# Altium PCB PCB1.PcbDoc
Units mil, origin at the board's own origin, x right, y up, seen from the top; angles counter-clockwise.
Board outline 6000 x 4000 mil, 2 copper layers (Top Layer, Bottom Layer); 41 components, 20 nets, 120 pads, 34 vias.
Unrouted connection lines stored in the file: 44.
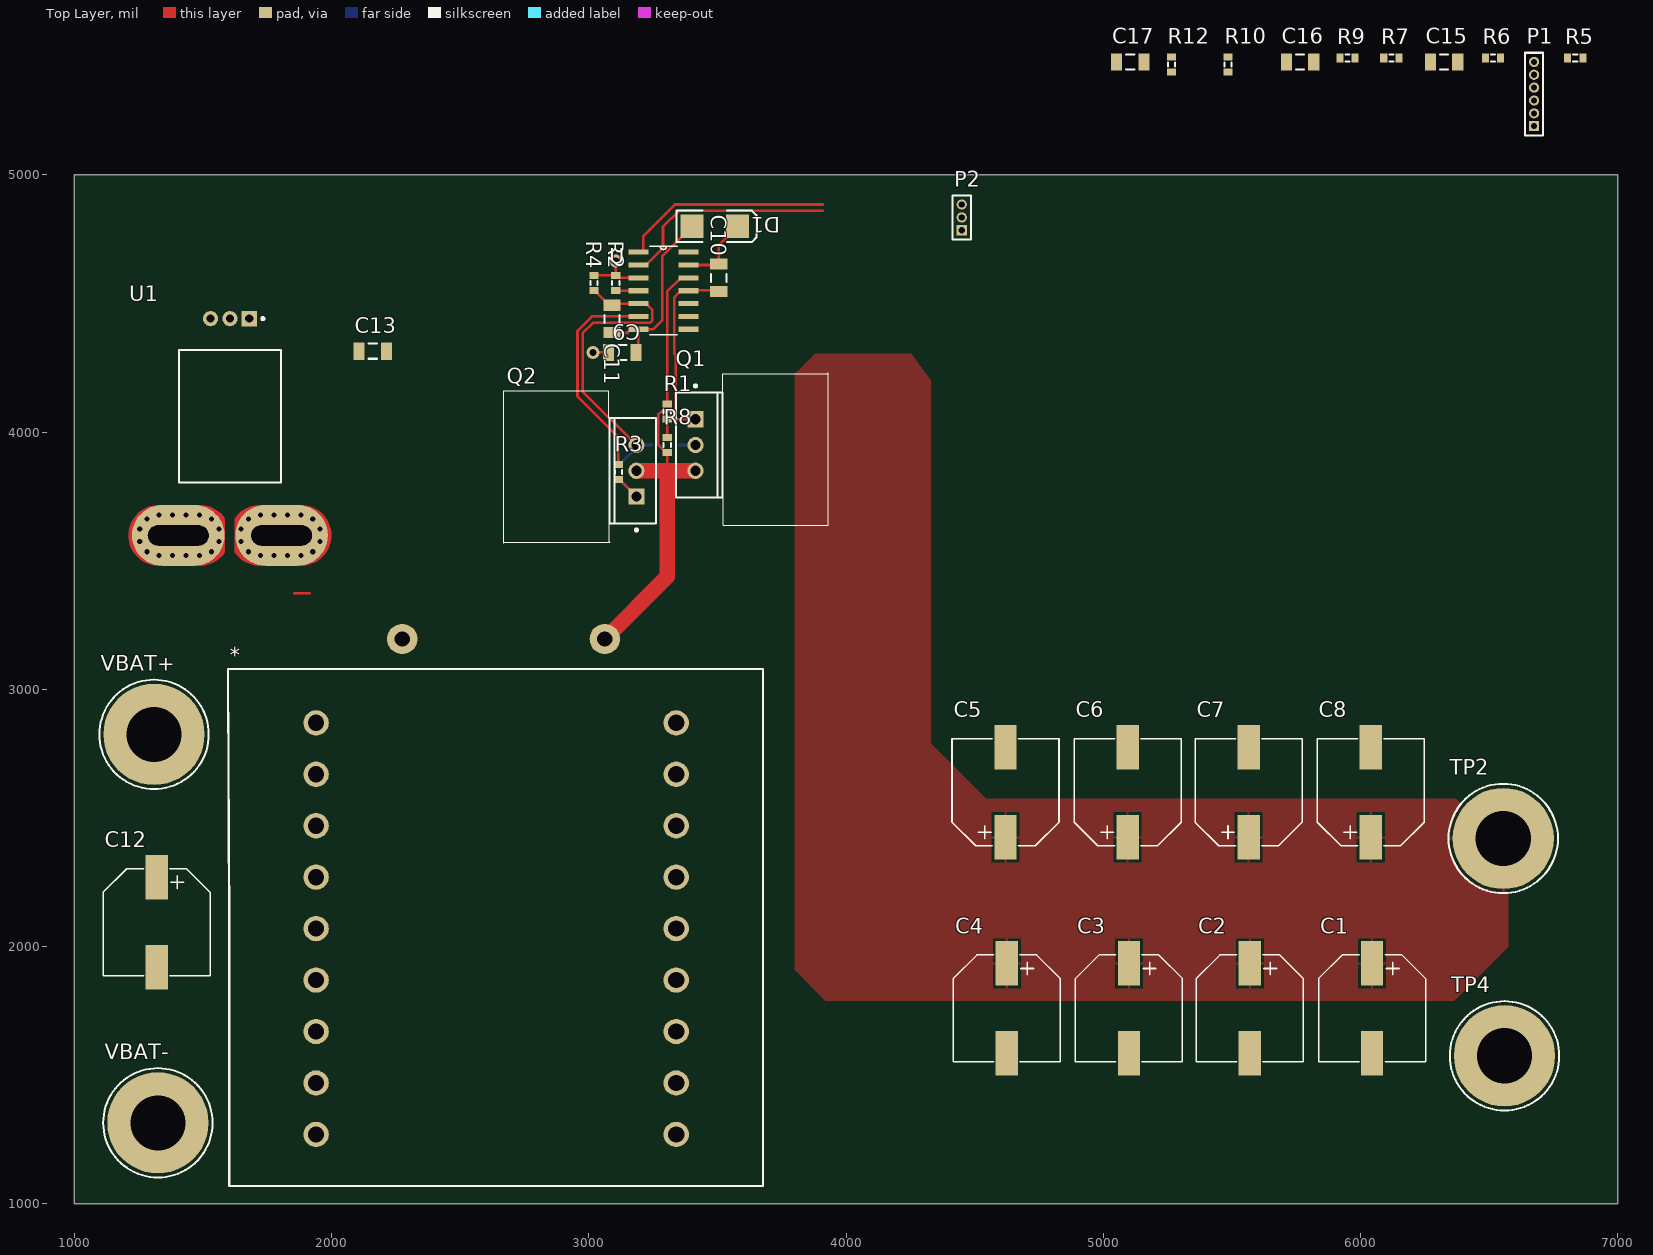
[diagram p0: Top Layer view]
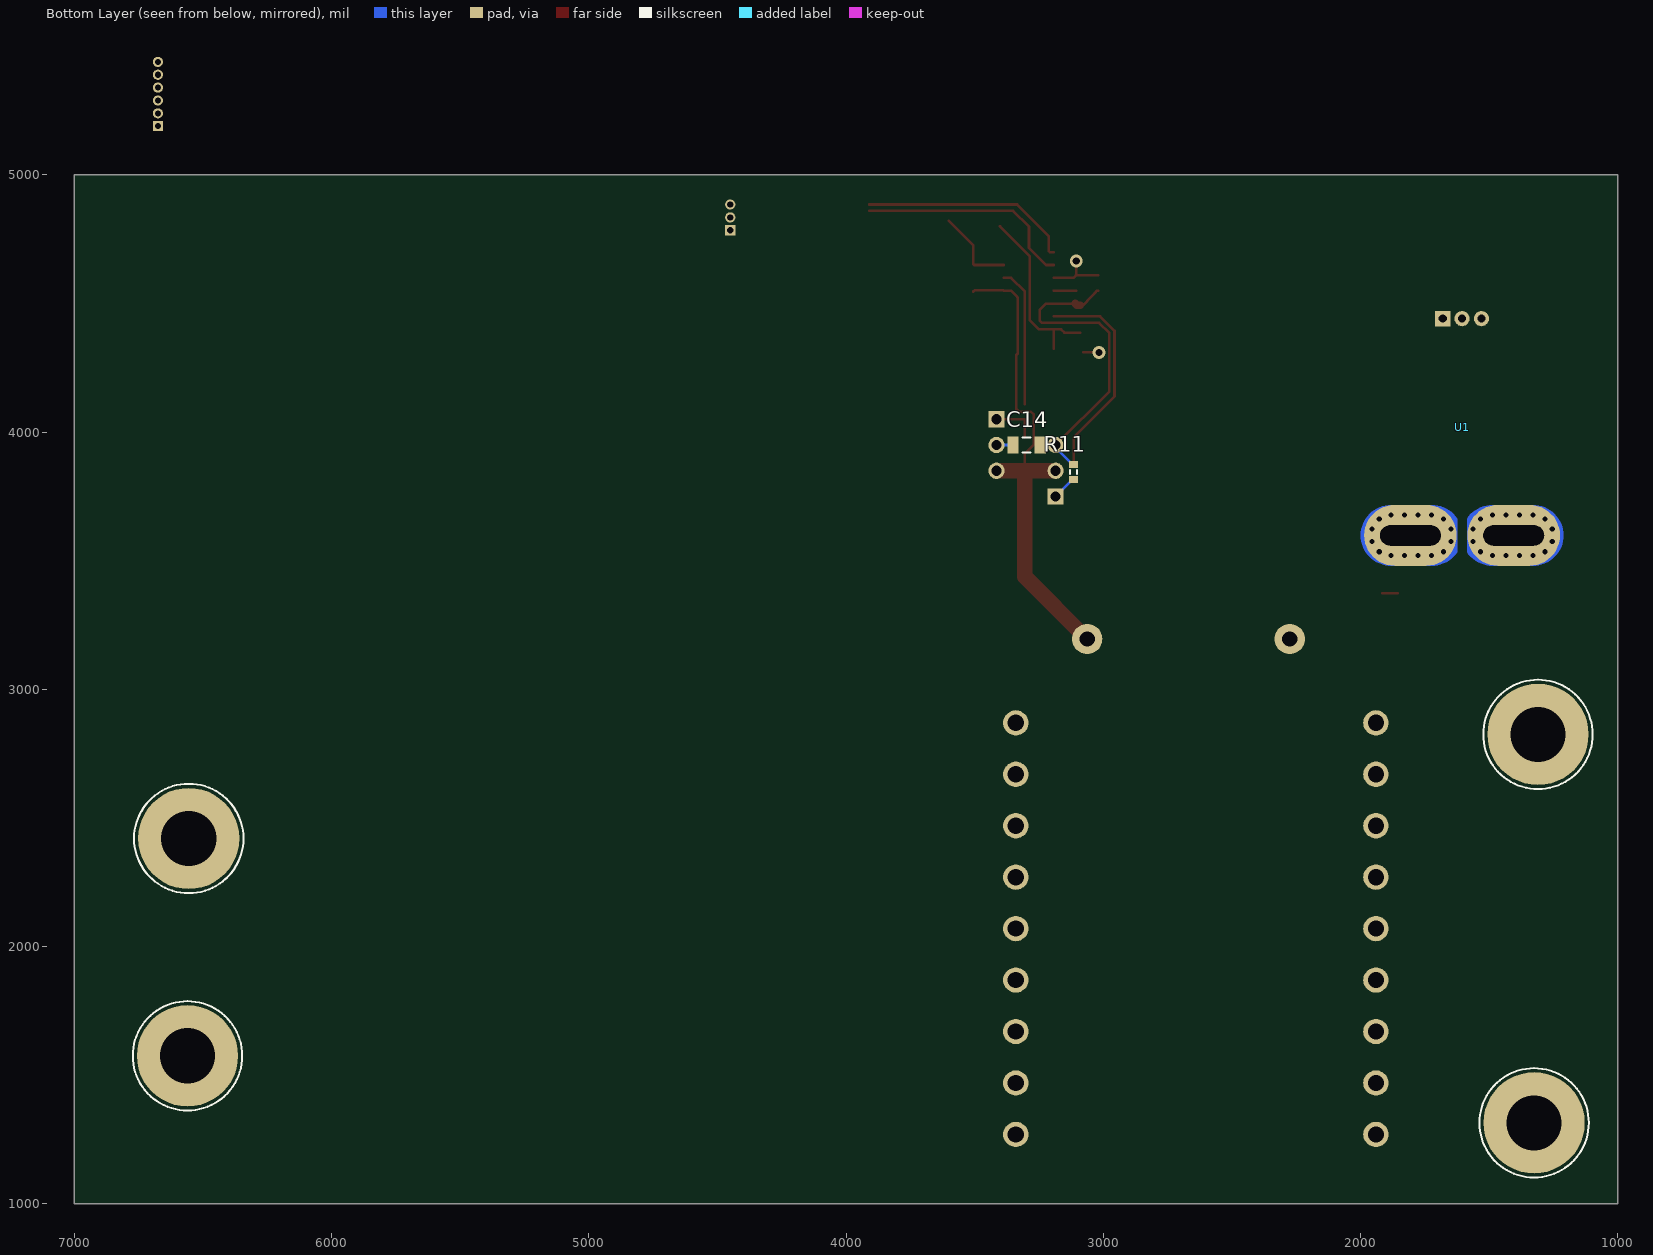
[diagram p1: Bottom Layer view, seen from below]

## Layer stack, top to bottom
Top Solder: solder mask 0.4, Solder Resist, Dk 3.5
Top Layer: signal copper 1.4
Dielectric 1: dielectric 12.6, FR-4, Dk 4.8
Bottom Layer: signal copper 1.4
Bottom Solder: solder mask 0.4, Solder Resist, Dk 3.5

## Board outline
1000,1000 7000,1000 7000,5000 1000,5000

## Design rules (kind name [scope] priority, off if disabled: settings)
Clearance [All] p1: gap=10 ignorepadtopadclearanceinfootprint=FALSE except(0: Arc-Hole Track-Hole SMDPad-Hole THPad-Hole Via-Hole Fill-Hole Poly-Hole Region-Hole Text-Hole)
Height [All] p1: minheight=0 maxheight=99999 prefheight=500
PolygonConnect [All] p1: connectstyle=Relief reliefconductorwidth=10 reliefentries=4 polygonreliefangle="90 Angle" airgapwidth=10
RoomDefinition SignalFilters [InComponentClass('SignalFilters')] p1: confinementstyle=ConfineIn formatcopy=TRUE lockcomponents=FALSE outline 5015,5144.53 6915,5144.53 6915,5584.53 5015,5584.53
RoutingVias [All] p1: holewidth=28 width=50 viastyle="Through Hole" minholewidth=28 minwidth=50 maxholewidth=28 maxwidth=50
SolderMaskExpansion [All] p1: expansion=4 istentingtop=FALSE
Width [InNetClass('Boost')] p1: maxlimit=500 minlimit=10 preferedwidth=300 bottomlayer_maxwidth=10 bottomlayer_prefwidth=10 minimp=50.000000 maximp=50.000000 favimp=50.000000
29 further rules are at their usual default settings.

## Classes and differential pairs
net class Control: +5 +15 DGND G_HO G_LO HIN Isense IsenseFiltered LIN NetC10_2 NetR1_2 NetR2_2 NetR3_2 NetU_8 NetU_9 NetU_10 NetU_14 PGND Vbat VbatFiltered Vout VoutFiltered Vs
net class Boost: G_HO G_LO Net*_1 PGND Vbat Vout Vs
component class SignalFilters: C15 C16 C17 P1 R5 R6 R7 R9 R10 R12 TP1 TP3 TP6 TP7 TP8
component class Sheet1: * C1 C2 C3 C4 C5 C6 C7 C8 C9 C10 C11 C12 C13 C14 D1 P2 Q1 Q2 R1 R2 R3 R4 R8 R11 TP2 TP4 U U1 VBAT+ VBAT-

## Components (designator, comment, footprint, x,y, rotation, side; value= is the part's Value field where it differs from the comment)
* "ETD44_inductor" ETD44 2640,2070 r0 top
C1 "47uF" CAP_PC_10X10 6045,1760 r270 top value=Value
C2 "47uF" CAP_PC_10X10 5570,1760 r270 top value=Value
C3 "47uF" CAP_PC_10X10 5100,1760 r270 top value=Value
C4 "47uF" CAP_PC_10X10 4625,1760 r270 top value=Value
C5 "47uF" CAP_PC_10X10 4620,2600 r90 top value=Value
C6 "47uF" CAP_PC_10X10 5095,2600 r90 top value=Value
C7 "47uF" CAP_PC_10X10 5565,2600 r90 top value=Value
C8 "47uF" CAP_PC_10X10 6040,2600 r90 top value=Value
C9 "" C1206 3130,4310 r0 top value=1uF
C10 "" C1206 3505,4600 r90 top value=1uF
C11 "" C1206 3090,4440 r270 top value=1uF
C12 "47uF" CAP_PC_10X10 1320,2095 r270 top value=Value
C13 "" C1206 2160,4315 r0 top value=1uF
C14 "" C1206 3298.15,3950 r180 bottom value=1uF
C15 "" C1206 6325,5439.53 r0 top value=33nF
C16 "" C1206 5765,5439.53 r0 top value=33nF
C17 "" C1206 5105,5439.53 r0 top value=2.2nF
D1 "D Schottky" SMB 3490,4800 r0 top
P1 "MHDR1X6" MHDR1X6 6675,5189.53 r90 top
P2 "MHDR1X3" MHDR1X3 4450,4785 r90 top
Q1 "IPP076N12N3 G" INF-PG-TO220-3-1_A_V 3415,3950 r0 top
Q2 "IPP076N12N3 G" INF-PG-TO220-3-1_A_V 3185,3850 r180 top
R1 "Res3" J1-0603 3305,4080 r90 top value=10
R2 "Res3" J1-0603 3105,4580 r270 top value=0
R3 "Res3" J1-0603 3115,3845 r90 top value=10
R4 "Res3" J1-0603 3020,4580 r90 top value=0
R5 "Res3" J1-0603 6835,5454.53 r0 top value=22k
R6 "Res3" J1-0603 6515,5454.53 r0 top value=1k
R7 "Res3" J1-0603 6120,5454.53 r0 top value=22k
R8 "Res3" J1-0603 3305,3950 r90 top value=10k
R9 "Res3" J1-0603 5950,5454.53 r0 top value=1k
R10 "Res3" J1-0603 5485,5429.53 r90 top value=22k
R11 "Res3" J1-0603 3115,3845 r270 bottom value=10k
R12 "Res3" J1-0603 5265,5429.53 r90 top value=33k
TP2 "575-4" KSTN-575-4 6555,2420.47 r0 top
TP4 "575-4" KSTN-575-4 6560,1575.47 r0 top
U "IR21834STRPBF" SOIC127P600X175-14N 3290,4550 r0 top
U1 "ACS770KCB-150B-PFF-T" ALLEGRO_MICROSYSTEMS_CB-PFF-5_0 1605,4020 r180 top
VBAT+ "575-4" KSTN-575-4 1310,2825 r0 top
VBAT- "575-4" KSTN-575-4 1325,1315 r0 top

## Footprints (in the part's own frame and the unit in brackets; to place one, negate y for a bottom-side part, rotate by r counter-clockwise, add the part's x,y. Pads: shape width x height; smd on the part's side, far side on the other; paste and mask are expansions set on the pad)
ALLEGRO_MICROSYSTEMS_CB-PFF-5_0 [mm]
  rect 1.5x1.5 hole 0.8 paste-1000 mask+0: 1(-1.91,-10.7)
  round 1.5 hole 0.8 paste-1000 mask+0: 2(0,-10.7) 3(1.91,-10.7)
  oval 9.144x6.02 hole 2 slot 5.994 at 0 deg paste-1000 mask+0: 4(5.099,10.7) 5(-5.099,10.7)
  round 5.4 smd far side paste-1000 mask+0: 4(5.099,10.7) 5(-5.099,10.7)
  Top Layer region: 0.5,12.358 1.581,13.343 3,13.7 3,13.7 7,13.7 8.302,13.403 9.345,12.57 9.925,11.368 9.925,10.032 9.345,8.83 8.302,7.997 7,7.7 7,7.7 3,7.7 1.581,8.057 0.5,9.042 0.5,9.042
  Top Layer region: -0.5,9.042 -1.581,8.057 -3,7.7 -3,7.7 -7,7.7 -8.302,7.997 -9.345,8.83 -9.925,10.032 -9.925,11.368 -9.345,12.57 -8.302,13.403 -7,13.7 -7,13.7 -3,13.7 -1.581,13.343 -0.5,12.358 -0.5,12.358
  Bottom Layer region: 0.5,12.358 1.581,13.343 3,13.7 3,13.7 7,13.7 8.302,13.403 9.345,12.57 9.925,11.368 9.925,10.032 9.345,8.83 8.302,7.997 7,7.7 7,7.7 3,7.7 1.581,8.057 0.5,9.042 0.5,9.042
  Bottom Layer region: -0.5,9.042 -1.581,8.057 -3,7.7 -3,7.7 -7,7.7 -8.302,7.997 -9.345,8.83 -9.925,10.032 -9.925,11.368 -9.345,12.57 -8.302,13.403 -7,13.7 -7,13.7 -3,13.7 -1.581,13.343 -0.5,12.358 -0.5,12.358
  silkscreen extent -5.05,-10.82 5.05,5.5, body extent -10.1,-11.55 10.1,13.8, height 0.25
C1206 [mm] "Chip Capacitor, Body 3.2x1.6mm, IPC High Density"
  rect 1.1x1.7 smd: 1(-1.35,0) 2(1.35,0)
  silkscreen extent -0.4,-0.75 0.4,0.75, body extent -1.7,-0.9 1.7,0.9, height 1.3
CAP_PC_10X10 [mil]
  rect 173x87 smd paste+0 mask+0: 1(-175,0) 2(175,0)
  silkscreen extent -208,-208 208,208, body extent -228,-207 229,206, height 506
ETD44 [mm]
  round 3 hole 1.5: 1(-9.271,28.6) 2(10.729,28.6)
  round 2.5 hole 1.6: NC(-17.78,-20.32) NC(-17.78,-15.24) NC(-17.78,-10.16) NC(-17.78,-5.08) NC(-17.78,0) NC(-17.78,5.08) NC(-17.78,10.16) NC(-17.78,15.24) NC(-17.78,20.32) NC(17.78,-20.32) NC(17.78,-15.24) NC(17.78,-10.16) NC(17.78,-5.08) NC(17.78,0) NC(17.78,5.08) NC(17.78,10.16) NC(17.78,15.24) NC(17.78,20.32)
  Top Layer lines w0.254: -16.866,-20.396 -16.662,-20.396
  silkscreen extent -26.47,-25.4 26.37,25.65, body extent -25.5,-24.8 25.5,24.8, height 38.11
INF-PG-TO220-3-1_A_V [mm] "FM, 3-Leads, Body 10.03x8.98mm, Pitch 2.54mm"
  rect 1.6x1.6 hole 1: 1(0,2.54)
  round 1.6 hole 1: 2(0,0) 3(0,-2.54)
  silkscreen extent -1.93,-7.9 13.11,7.14, body extent -1.93,-7.85 13.03,7.03, height 23.52
J1-0603 [mm] "Chip Resistor, Body 1.6x0.8mm, IPC High Density"
  rect 0.7x0.9 smd: 1(-0.75,0) 2(0.75,0)
  silkscreen extent -0.2,-0.35 0.2,0.35, body extent -0.85,-0.48 0.85,0.48, height 0.9
KSTN-575-4 [mm] "Banana Jack, Non-Insulated, Dia 7.92mm"
  round 10 hole 5.45: 1(0,0)
  silkscreen extent -5.4,-5.4 5.4,5.4, body extent -3.98,-3.96 3.92,3.94, height 2.36
MHDR1X3 [mm] "Connector; Header; 3 Position"
  rect 1x1 hole 0.6: 1(0,0)
  round 1 hole 0.6: 2(1.27,0) 3(2.54,0)
  silkscreen extent -0.9,-0.9 3.44,0.9
MHDR1X6 [mm] "Connector; Header; 6 Position"
  rect 1x1 hole 0.6: 1(0,0)
  round 1 hole 0.6: 2(1.27,0) 3(2.54,0) 4(3.81,0) 5(5.08,0) 6(6.35,0)
  silkscreen extent -0.9,-0.9 7.25,0.9
SMB [mm] "DO-214-AA/SMB; 2 C-Bend Leads; Body 5.3 x 3.6 mm, inc. leads (LxW)"
  rect 2.3x2.3 smd: 1(-2.25,0) 2(2.25,0)
  silkscreen extent -3.8,-1.55 4.1,1.55
SOIC127P600X175-14N [mil]
  rect 78x20 smd: 1(-97,150) 2(-97,100) 3(-97,50) 4(-97,0) 5(-97,-50) 6(-97,-100) 7(-97,-150) 8(97,-150) 9(97,-100) 10(97,-50) 11(97,0) 12(97,50) 13(97,100) 14(97,150)
  silkscreen extent -53,-172 53,172, body extent -121,-173 121,173, height 79

## Part data
C1 C2 C3 C4 C5 C6 C7 C8 C12: library part A767MU476M1KLAE040, "CAP ALUM POLY 47UF 20% 80V SMD", Case/Package=Radial, ESR (Equivalent Series Resistance)=40mR, Manufacturer=KEMET, Max Operating Temperature=105°C, Min Operating Temperature=-55°C, Supplier Part Number 1=399-15651-1-ND, Tolerance=20%, Voltage Rating=80V, Built_By=EMA_Cory, Capacitance=47uF, Category=Capacitors, ComponentLink1Description=https://api.kemet.com/component-edge/download/datasheet/A767MU476M1KLAE040.pdf?src-supplier=Digi-Key, ComponentLink1URL=https://api.kemet.com/component-edge/download/datasheet/A767MU476M1KLAE040.pdf?src-supplier=Digi-Key, ComponentLink2Description=SupplierDigikey, ComponentLink2URL=https://www.digikey.com/product-detail/en/kemet/A767MU476M1KLAE040/399-15651-6-ND/7392929, Copyright="Copyright (C) 2018 Accelerated Designs. All rights reserved", Life (Hours)=2000Hour, Manufacturer Part Number=A767MU476M1KLAE040, Manufacturer_Part_Number=KEMET, Mount="Surface Mount", Packaging="Tape and Reel", Pricing 1="1=3.12000, 10=2.52600, 100=1.92890 (USD)", RefDes=RefDes, RoHS=No, Stock 1=1540, Supplier 1=Digi-Key, Type=DEV, Vendor=Nichicon
C9 C10 C11 C13 C14 C15 C16 C17: library part "Cap Semi", "Capacitor (Semiconductor SIM Model)", LatestRevisionDate=29-May-2009, LatestRevisionNote="IPC-7351 Footprint Added.", PackageDescription="Chip Capacitor", PackageReference=C1206, Published=8-Jun-2000, Publisher="Altium Limited"
D1: "Schottky Diode", Code_JEDEC=DO-214-AA, LatestRevisionDate=17-Jul-2002, LatestRevisionNote="Re-released for DXP Platform.", PackageDescription="DO-214-AA/SMB; 2 C-Bend Leads; Body 5.3 x 3.6 mm, inc. leads (LxW)", PackageReference=SMB, Published=8-Jun-2000, Publisher="Altium Limited"
P1: "Header, 6-Pin", LatestRevisionDate=17-Jul-2002, LatestRevisionNote="Re-released for DXP Platform.", Publisher="Altium Limited"
P2: "Header, 3-Pin", LatestRevisionDate=17-Jul-2002, LatestRevisionNote="Re-released for DXP Platform.", Publisher="Altium Limited"
Q1 Q2: "N-Channel OptiMOS 3 Power-Transistor, 120 V VDS, 100 A ID, -55 to 175 degC, PG-TO220-3-1, Tube, Green", Manufacturer=Infineon, Supplier Part Number 1=726-IPP076N12N3GXK, ComponentLink1Description="Manufacturer URL", ComponentLink1URL=http://www.infineon.com/, ComponentLink2Description=Datasheet, ComponentLink2URL=http://www.infineon.com/dgdl/IPP_I076N12N3+G_Rev2.3.pdf?folderId=db3a304313b8b5a60113cee8763b02d7&fileId=db3a30432239cccd0122a77a83ab7cd4, ComponentLink3Description="Package Specification", ComponentLink3URL=http://www.infineon.com/dgdl/IPP028N08N3_Rev1%5B1%5D.0.pdf?folderId=db3a304313b8b5a60113cee8763b02d7&fileId=db3a30432313ff5e0123a3c08e7326b5, DatasheetVersion="Rev. 2.3", Green=TRUE, Halogen-free=TRUE, ID (max)="100 A", IDpuls (max)="400 A", Mounting Technology="Through Hole", PackageDescription="3-Pin Plastic (Green) Transistor Single Outline Package, 10.03 x 8.98 mm Body, 2.54 mm Pitch", PackageReference=PG-TO220-3-1, PackageVersion="Rev. 05, 08/2007", Packing=Tube, PartNumber="IPP076N12N3 G", Polarity=N, Ptot (max)="188 W", QG="76 nC", RDS (on) (max)="7.6 mOhm", Rth="0.8 K/W", RthJA (max)="62 K/W", RthJC (max)="0.8 K/W", Supplier 1=Mouser, Supplier 2=Digi-Key, Supplier Part Number 2="IPP076N12N3 G-ND", VDS (max)="120 V", VGS(th) (max)="4 V", VGS(th) (min)="2 V"
R1 R2 R3 R4 R5 R6 R7 R8 R9 R10 R11 R12: "Resistor", LatestRevisionDate=29-May-2009, LatestRevisionNote="IPC-7351 Footprint Added.", PackageDescription="Chip Resistor", PackageReference=J1-0603, Published=8-Jun-2000, Publisher="Altium Limited"
TP2 TP4 VBAT+ VBAT-: library part CMP-2000-05649-1, "Banana Jack, Non-Insulated, 1-Pin THD, RoHS, Bulk", Color=-, Manufacturer=Keystone-Electronics, Package Description="1-Pin Through Hole Device, Dia 7.92 mm", Package Version="Rev. B, 11/1994", Body Material=-, Category=Connectors,Interconnects, ComponentLink1Description=SupplierDigikey, ComponentLink1URL=https://www.digikey.com/product-detail/en/keystone-electronics/575-4/36-575-4-ND/318493, Contact Finish=Nickel, Contact Material=Brass, Datasheet URL=http://www.keyelco.com/product-pdf.cfm?p=2379, Datasheet Version="Rev. B, 11/1994", Family=BananaandTipConnectors-Jacks,Plugs, Features=-, Gender=Female, Insulation=Non-Insulated, Manufacturer URL=http://www.keyelco.com/, Mounting Technology=ThroughHole, Mounting Type=ThroughHole, Operating Temperature=-, Package Reference=575-4, Package URL=http://www.keyelco.com/product-pdf.cfm?p=2379, Packaging=Bulk, Plug/Mating Plug Diameter=StandardBanana, Series=-, Termination=Solder, Type=BananaJack, Wire Gauge=-
U: "INTERNATIONAL RECTIFIER   IR21834STRPBF   MOSFET DRIVER, HALF BRIDGE, SOIC-14, FULL REEL", Case/Package=SOIC, Manufacturer="International Rectifier", Manufacturer Part Number=IR2183STRPBF, Max Operating Temperature=125°C, Max Output Current=2.3A, Max Power Dissipation=625mW, Max Supply Current=1.6mA, Max Supply Voltage=20V, Min Operating Temperature=-40°C, Min Supply Voltage=10V, Nominal Supply Current=1mA, Output Current=1.9A, Package="SOIC-14 Infineon", Package Quantity=1, Category=MOSFETs, ComponentLink1Description=SupplierDigikey, ComponentLink1URL=https://www.digikey.com/product-detail/en/infineon-technologies/IR21834STRPBF/IR21834SPBFCT-ND/827949, ComponentLink2Description=Datasheet, ComponentLink2URL=https://www.infineon.com/dgdl/ir2183.pdf?fileId=5546d462533600a4015355c9490e16d1, Digi-Key_Part_Number=IR21834SPBFCT-ND, Digi-Key_Purchase_URL=https://www.digikey.com/product-detail/en/infineon-technologies/IR21834STRPBF/IR21834SPBFCT-ND/827949?utm_source=snapeda&utm_medium=aggregator&utm_campaign=symbol, Fall Time=35ns, Height=1.5mm, Length=8.74mm, MF="Infineon Technologies", Mount="Surface Mount", MP=IR21834STRPBF, Number of Drivers=2, Number of Outputs=2, Number of Pins=8, Operating Supply Current=1.6mA, Output Voltage=20V, Packaging="Tape and Reel", Power Dissipation=625mW, Pricing 1="1=3.18000, 10=2.85300, 25=2.69760, 100=2.21800, 250=1.99016, 500=1.91824, 1000=1.59454 (USD)", Pricing 2="1=3.19000, 10=2.86600, 25=2.70960, 100=2.22780, 250=1.99896, 500=1.92672, 1000=1.60159 (USD)", Propagation Delay=330ns, Radiation Hardening=No, REACH SVHC="No SVHC", Rise Time=60ns, RoHS=Yes, SnapEDA_Link=https://www.snapeda.com/parts/IR21834STRPBF/Infineon%20Technologies/view-part/528919/?ref=snap, Stock 1=12591, Stock 2=6093, Supplier 1=Digi-Key, Supplier 2=Digi-Key, Supplier 3=Digi-Key, Supplier Part Number 3=IR21834SPBFCT-ND, Turn-Off Delay Time=220ns, Turn-On Delay Time=35ns, Weight=0.019048oz, Width=3.99mm
U1: "ALLEGRO MICROSYSTEMS - ACS770LCB-050U-PFF-T - HIGH PRECISION LINEAR CURRENT SENSOR ROHS COMPLIANT: YES", Current Sensing=50A, Frequency=120kHz, Manufacturer="Allegro MicroSystems", Manufacturer Part Number=ACS770LCB-050U-PFF-T, Max Operating Temperature=150°C, Max Supply Current=15mA, Min Operating Temperature=-40°C, Supplier Part Number 1=620-1542-5-ND, Accuracy=0.6%, Category="Current Sensors", ComponentLink1Description="Digikey Datasheet", ComponentLink1URL=https://www.allegromicro.com/~/media/Files/Datasheets/ACS770-Datasheet.pdf?src-supplier=Digi-Key, ComponentLink2Description="Newark Datasheet", ComponentLink2URL=http://www.farnell.com/datasheets/2838159.pdf?src-supplier=Newark, ComponentLink3Description=SupplierDigikey, ComponentLink3URL=https://www.digikey.com/product-detail/en/allegro-microsystems/ACS770LCB-050U-PFF-T/620-1542-5-ND/4473981, Linearity=1%, Mount="Through Hole", Number of Channels=1, Packaging=Rail/Tube, Polarity=Unidirectional, Pricing 1="1=7.18000, 5=6.30000, 10=5.67000, 25=5.04000, 50=4.66200, 100=4.03200, 500=3.78000, 1000=3.52800 (USD)", Response Time=4.6us, RoHS=No, Sensitivity=80mV/A, Stock 1=4174, Supplier 1=Digi-Key
*: ComponentLink1Description=DigikeyDistributer, ComponentLink1URL=https://www.digikey.com/product-detail/en/tdk-electronics-inc/B66366B1018T001/495-5481-ND/3914838

## Via types
v1: diameter 31.5, hole 19.68, Top Layer to Bottom Layer, 32 vias
v2: diameter 50, hole 28, Top Layer to Bottom Layer, 2 vias

## Nets (pads, with @x,y where several pads share a name; then routed paths per layer and width w, separated by ;. In a path a pad name is that pad's centre, name@x,y a point inside that pad or via, vN(x,y) a via of type N, cw(c..) or ccw(c..) an arc to the next point about the centre after c; other vN are vias at no path point)
+5: C13.2 P2.2 U1.1
+15: C9.2 C11.2 D1.1 P2.3 U.7 | length 703.6
  Top Layer w10: C11.2 3150.85,4386.85 3164,4400 U.7 ; C9.2@3191.85,4325 3193,4326.15 U.7 ; D1.1 3285,4683.58 3285,4435 3250,4400 U.7
DGND: C9.1 C13.1 C17.2 P1.6 P2.1 R2.1 R4.2 R12.2 U1.2 U.3 | length 293.4
  Top Layer w10: v2(3016.25,4310) C9.1 ; R4.2 3020.47,4610 3104.53,4610 R2.1 ; v2(3105,4665) R2.1 ; U.3 3116.02,4600 3106.5,4609.53 R2.1
G_HO: Q1.1 R1.1 R8.2 | length 176.1
  Top Layer w10: R8.2 R1.1 ; R1.1@3310,4050.47 3414.53,4050.47 Q1.1
G_LO: Q2.1 R3.1 R11.2 | length 194.2
  Top Layer w10: R3.1 3118.94,3815.47 3157.91,3776.5 3158.5,3776.5 Q2.1
  Bottom Layer w10: R11.2 3123.78,3806.69 3128.31,3806.69 Q2.1
HIN: P1.1 U.1 | length 827.1
  Top Layer w10: U.1 3207.14,4700 3212.14,4705 3212.14,4762.14 3335,4885 3910,4885
Isense: R10.2 U1.3
IsenseFiltered: C17.1 P1.4 R10.1 R12.1
LIN: P1.2 U.2 | length 852.5
  Top Layer w10: U.2 3222,4650 3288.46,4716.46 3288.46,4798.81 3349.93,4860.28 3909.72,4860.28 3910,4860
Net*_1: *.1 U1.5
  other v1: 1723.11,3520 1775.6,3520 1828.1,3520 1880.59,3520 1676.81,3535.04 1926.89,3535.04 1648.23,3574.41 1955.47,3574.41 1648.23,3623.07 1955.47,3623.07 1676.81,3662.44 1926.89,3662.44 1723.11,3677.48 1775.6,3677.48 1828.1,3677.48 1880.59,3677.48
NetC10_2: C10.2 D1.2 U.13 | length 326.9
  Top Layer w10: U.13 3501.85,4650 C10.2 3505,4726.42 D1.2 D1.2@3600,4821.42
NetR1_2: R1.2 U.12 | length 541.4
  Top Layer w10: R1.2 3305,4547 3358,4600 U.12
NetR2_2: R2.2 U.4 | length 88.2
  Top Layer w10: R2.2 3105.24,4550.24 3192.76,4550.24 U.4
NetR3_2: R3.2 U.6 | length 845.2
  Top Layer w10: R3.2 3115,3980 2956.25,4138.75 2956.25,4394.06 3012.19,4450 U.6
PGND: C1.2 C2.2 C3.2 C4.2 C5.2 C6.2 C7.2 C8.2 C11.1 C12.2 C14.2 C15.2 C16.2 Q2.3 R4.1 R6.1 R9.1 R11.1 TP4.1 U.5 VBAT-.1 | length 1286.4
  Top Layer w10: R4.1 3023.94,4550.47 3032.72,4541.69 3032.72,4540.14 3061.54,4511.32 3061.54,4509.8 3078.19,4493.15 C11.1 ; C11.1@3108.66,4500 U.5 3222,4500 3247,4475 3247,4433.79 3238.21,4425 3015.86,4425 2976.25,4385.39 2976.25,4158.75 Q2.3
  Top Layer w30: C11.1 3101.81,4493.15 C11.1@3108.66,4500
  Bottom Layer w10: R11.1 3118.94,3874.53 3185,3940.59 Q2.3 C14.2
Vbat: C12.1 R5.2 U1.4 VBAT+.1 | length 83.9
  Top Layer w10: 1855.74,3373.74 1914.24,3373.74
  Top Layer w300: VBAT+.1@1310,2799.64 VBAT+.1
  other v1: 1329.41,3520 1381.9,3520 1434.4,3520 1486.89,3520 1283.11,3535.04 1533.19,3535.04 1254.53,3574.41 1561.77,3574.41 1254.53,3623.07 1561.77,3623.07 1283.11,3662.44 1533.19,3662.44 1329.41,3677.48 1381.9,3677.48 1434.4,3677.48 1486.89,3677.48
VbatFiltered: C15.1 P1.5 R5.1 R6.2
Vout: C1.1 C2.1 C3.1 C4.1 C5.1 C6.1 C7.1 C8.1 C14.1 Q1.2 R7.2 TP2.1 | length 63.7
  Bottom Layer w10: C14.1 Q1.2
VoutFiltered: C16.1 P1.3 R7.1 R9.2
Vs: *.2 C10.1 Q1.3 Q2.2 R8.1 U.11 | length 1918.5
  Top Layer w10: 3305,3850 R8.1 3301.06,3920.47 3270,3951.54 3270,4068.18 3281.82,4080 3328.18,4080 3337.72,4089.53 3337.72,4300.52 3333,4305.23 3333,4523 3335,4525 3335,4527 3358,4550 U.11 3388.71,4551.71 3500.14,4551.71 C10.1
  Top Layer w60: *.2 3305,3438.6 3305,3850 ; Q2.2 3305,3850 ; Q1.3 3305,3850
pads on no net: *.NC U.8 U.9 U.10 U.14

## Polygon pours and split planes (outlines as drawn)
Vout on Top Layer "VOUT_L01_P000" (solid, pour order 0): 4330,4201.76 4330,2790 4545,2575 6370,2575 6585,2360 6575,2350 6575,2000 6365,1790 3920,1790 3800,1910 3800,4225 3880,4305 4253.7,4305
no net on Top Layer "NONET_L01_P002" (solid, pour order 2): 1145,3540